# Altium PCB РАЗВОДКА.PcbDoc (part 2 of 2)
Units mm, origin at the board's own origin, x right, y up, seen from the top; angles counter-clockwise.
Board outline 89.98 x 48.1 mm, 2 copper layers (Top Layer, Bottom Layer); 66 components, 44 nets, 297 pads, 65 vias.
Unrouted connection lines stored in the file: 12.
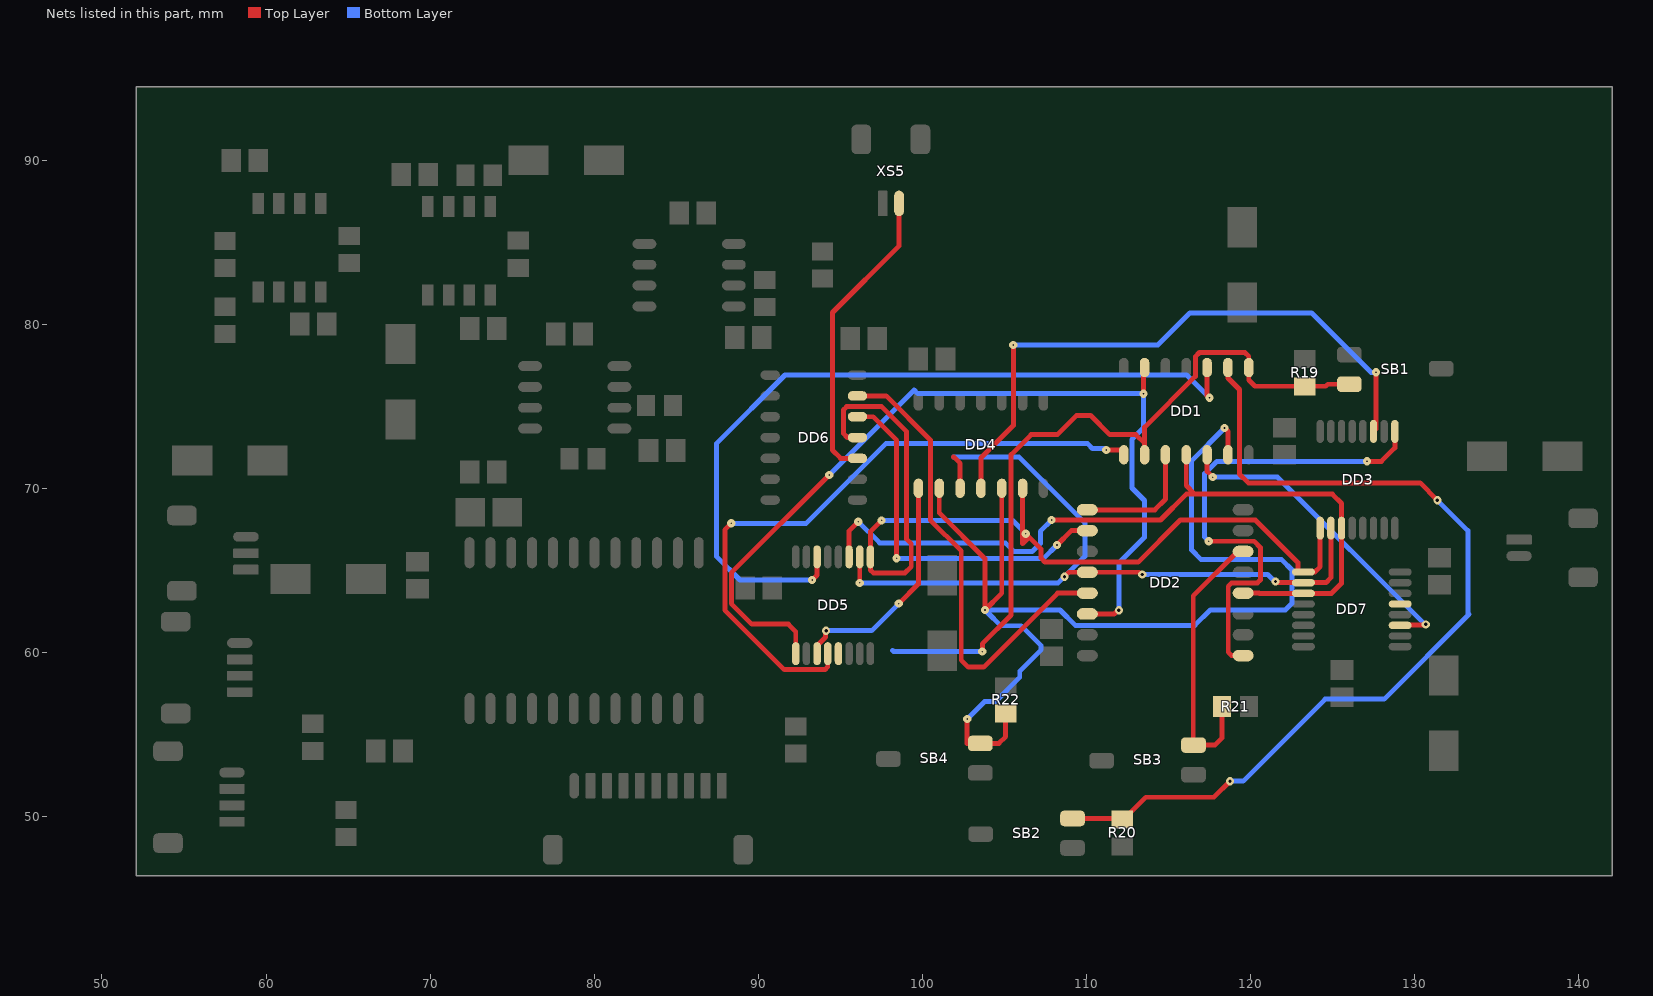
[diagram p2: the nets of this part, all layers, seen from the top]

## Via types
v1: diameter 0.5, hole 0.1, Top Layer to Bottom Layer, 37 vias
v2: diameter 0.5, hole 0.2, Top Layer to Bottom Layer, 22 vias
v3: diameter 3.8, hole 3.8, Top Layer to Bottom Layer, 4 vias
v4: diameter 0.711, hole 0.711, Top Layer to Bottom Layer, 2 vias

## Nets (pads, with @x,y where several pads share a name; then routed paths per layer and width w, separated by ;. In a path a pad name is that pad's centre, name@x,y a point inside that pad or via, vN(x,y) a via of type N, cw(c..) or ccw(c..) an arc to the next point about the centre after c; other vN are vias at no path point) (continued)
NetDD1_1: DD1.1 DD1.9 DD5.5 R19.1 SB1.2 | length 46.6
  Top Layer w0.3: v1(103.675,60.05) 103.675,60.52 105.435,62.281 105.435,72.06 106.655,73.279 108.25,73.279 109.421,74.45 110.27,74.45 111.441,73.279 113.037,73.279 113.57,72.746 ; DD1.9@113.57,72.05 113.57,72.746 ; SB1.2@126.05,76.35 124.737,76.35 124.612,76.225 R19.1@123.325,76.225 120.301,76.225 119.92,76.606 DD1.1@119.92,77.37 119.92,78.048 119.685,78.283 116.916,78.283 116.662,78.029 116.662,76.828 113.57,73.736 113.57,72.746
  Bottom Layer w0.3: 98.196,60.122 98.268,60.05 v1(103.675,60.05)
NetDD1_2: DD1.2 DD7.5 R20.1 SB2.2 | length 56.6
  Top Layer w0.3: SB2.2@109.175,49.875 112.15,49.875 R20.1@112.2,49.825 112.3,49.825 113.643,51.168 117.793,51.168 v2(118.775,52.15) ; DD1.2@118.65,77.37 118.65,76.733 119.355,76.029 119.355,70.866 119.888,70.333 130.364,70.333 v2(131.42,69.277)
  Bottom Layer w0.3: v2(118.775,52.15) 119.575,52.15 124.575,57.15 128.175,57.15 133.35,62.325 133.275,62.4 133.275,67.422 v2(131.42,69.277)
NetDD1_3: DD1.3 DD5.14 | length 49.1
  Top Layer w0.3: v1(93.294,64.414) 93.6,64.72 DD5.14@93.6,65.825 ; DD1.3@117.38,77.37 117.38,75.67 v1(117.525,75.525)
  Bottom Layer w0.3: v1(93.294,64.414) 88.9,64.414 87.478,65.837 87.478,72.746 91.643,76.911 116.139,76.911 v1(117.525,75.525)
NetDD1_6: DD1.6 DD2.14 DD5.1 | length 55.8
  Top Layer w0.3: DD5.1@92.3,59.925 92.3,61.268 91.846,61.722 89.62,61.722 88.375,62.967 88.375,64.855 v1(94.336,70.815) ; DD2.14@110.075,62.345 111.716,62.345 111.946,62.575 v2(112,62.575) ; v1(113.5,75.775) 113.5,77.3 DD1.6@113.57,77.37
  Bottom Layer w0.3: v1(94.336,70.815) 99.517,75.997 99.739,75.775 v1(113.5,75.775) 113.5,73.688 112.8,72.988 112.8,70.023 113.563,69.259 113.563,67.013 112,65.45 v2(112,62.575)
NetDD1_8: DD1.8 DD5.4 | length 40.5
  Top Layer w0.3: v1(88.367,67.869) 87.975,67.477 87.975,62.575 91.597,58.953 94.082,58.953 94.25,59.122 DD5.4@94.25,59.925 ; v1(111.227,72.339) 112.3,72.339 DD1.8@112.3,72.05
  Bottom Layer w0.3: v1(88.367,67.869) 92.939,67.869 97.795,72.725 110.094,72.725 110.386,72.433 111.133,72.433 v1(111.227,72.339)
NetDD1_10: DD1.10 DD2.9 | length 7.7
  Top Layer w0.3: DD2.9@110.075,68.695 114.198,68.695 114.84,69.337 DD1.10@114.84,72.05
NetDD1_11: DD1.11 DD2.4 DD3.11 DD5.11 DD7.11 | length 48.5
  Top Layer w0.3: DD5.11@95.55,65.825 95.55,67.407 v1(96.114,67.97) ; v1(107.899,68.072) 114.535,68.072 116.11,69.647 116.637,69.647 ; DD1.11@116.11,72.05 116.11,70.174 116.637,69.647 ; DD2.4@119.575,63.615 120.552,63.615 120.567,63.6 DD7.11@123.25,63.6 124.964,63.6 125.575,64.211 DD3.11@125.575,67.575 125.575,69.088 125.016,69.647 116.637,69.647
  Bottom Layer w0.3: v1(96.114,67.97) 97.409,66.675 105.08,66.675 105.613,66.142 106.705,66.142 107.213,66.65 107.213,67.386 v1(107.899,68.072)
NetDD1_12: DD1.12 DD7.3 | length 19.8
  Top Layer w0.3: DD1.12@117.38,72.05 117.38,71.037 v1(117.729,70.688) ; DD7.3@129.15,61.65 129.179,61.679 130.677,61.679 v2(130.708,61.71)
  Bottom Layer w0.3: v1(117.729,70.688) 121.67,70.688 130.648,61.71 v2(130.708,61.71)
NetDD1_13: DD1.13 DD4.2 DD4.5 R22.1 SB4.2 | length 71.2
  Top Layer w0.3: DD4.2@101.05,70.005 101.05,68.505 103.835,65.72 v1(103.835,62.586) 104.86,63.61 DD4.5@104.86,70.005 ; v1(102.751,55.938) 102.751,54.45 SB4.2@103.55,54.45 104.686,54.45 105.1,54.864 R22.1@105.1,56.275 ; v1(118.44,73.685) 118.65,73.476 DD1.13@118.65,72.05
  Bottom Layer w0.3: v1(102.751,55.938) 103.819,57.007 104.482,57.007 105.956,58.481 105.956,58.856 107.263,60.163 107.263,60.412 106.05,61.625 104.796,61.625 103.989,62.432 v1@103.989,62.586 ; v1(103.835,62.586) v1@103.989,62.586 ; v1(118.44,73.685) 116.434,71.679 116.434,66.243 117.018,65.659 121.92,65.659 122.555,65.024 122.555,62.992 122.149,62.586 117.57,62.586 116.635,61.65 109.349,61.65 108.414,62.586 v1@103.989,62.586
NetDD2_1: DD2.1 DD3.1 | length 29.9
  Top Layer w0.3: v1(117.475,66.777) 120.244,66.777 120.625,66.396 120.625,64.414 120.447,64.237 118.872,64.237 118.669,64.033 118.669,60.008 118.872,59.805 DD2.1@119.575,59.805 ; v1(127.125,71.65) 128.005,71.65 128.825,72.47 DD3.1@128.825,73.475
  Bottom Layer w0.3: v1(117.475,66.777) 117.229,67.023 117.229,70.895 117.984,71.65 v1(127.125,71.65)
NetDD2_6: DD2.6 R21.1 SB3.2 | length 17.1
  Top Layer w0.3: R21.1@118.275,56.7 118.275,54.769 117.856,54.35 SB3.2@116.55,54.35 116.535,54.35 116.535,63.449 119.241,66.155 DD2.6@119.575,66.155
NetDD2_10: DD2.10 DD6.12 | length 22.5
  Top Layer w0.3: DD6.12@96.06,74.37 97.015,74.37 98.45,72.935 v1(98.45,65.735) ; v1(108.229,66.548) 109.106,67.425 DD2.10@110.075,67.425
  Bottom Layer w0.3: v1(98.45,65.735) 107.417,65.735 v1(108.229,66.548)
NetDD2_12: DD2.12 DD3.10 DD4.3 DD5.10 DD7.10 | length 49.5
  Top Layer w0.3: v1(96.2,64.237) DD5.10@96.2,65.825 ; 101.922,71.925 102.32,71.526 DD4.3@102.32,70.005 ; v2(108.687,64.618) 108.954,64.885 DD2.12@110.075,64.885 113.236,64.885 113.371,64.75 v2(113.425,64.75) ; v2(121.55,64.325) 121.604,64.325 121.679,64.25 DD7.10@123.25,64.25 124.625,64.25 124.925,64.55 DD3.10@124.925,67.575
  Bottom Layer w0.3: v1(96.2,64.237) 108.306,64.237 109.925,65.856 109.925,67.9 105.901,71.925 101.922,71.925 ; v2(113.425,64.75) 121.071,64.75 121.496,64.325 v2(121.55,64.325)
NetDD2_13: DD2.13 DD6.13 | length 29.5
  Top Layer w0.3: DD6.13@96.06,75.64 97.817,75.64 100.508,72.949 100.508,68.068 102.387,66.189 102.387,59.53 102.819,59.098 103.752,59.098 108.268,63.615 DD2.13@110.075,63.615
NetDD3_3: DD3.3 DD4.4 | length 37.6
  Top Layer w0.3: DD4.4@103.59,70.005 103.59,71.865 105.562,73.838 v1(105.562,78.74) ; DD3.3@127.525,73.475 127.675,73.625 v1(127.675,77.075)
  Bottom Layer w0.3: v1(105.562,78.74) 114.376,78.74 116.332,80.696 123.749,80.696 127.37,77.075 v1(127.675,77.075)
NetDD3_9: DD3.9 DD4.6 DD5.9 DD6.11 DD7.9 | length 58.6
  Top Layer w0.3: DD6.11@96.06,73.1 95.454,73.1 95.199,73.355 95.199,74.778 95.402,74.981 97.536,74.981 99.06,73.457 99.06,66.904 99.339,66.624 99.339,65.227 98.958,64.846 97.028,64.846 96.85,65.024 DD5.9@96.85,65.825 96.85,67.361 v1(97.536,68.047) ; DD4.6@106.13,70.005 106.13,66.635 106.527,67.032 ; v1(106.324,67.234) 106.527,67.032 ; DD3.9@124.275,67.575 124.275,65.223 123.952,64.9 DD7.9@123.25,64.9 122.911,64.9 122.911,65.481 120.32,68.072 115.748,68.072 113.182,65.507 107.493,65.507 107.259,65.741 107.259,66.3 106.527,67.032
  Bottom Layer w0.3: v1(97.536,68.047) 105.512,68.047 v1(106.324,67.234)
NetDD4_1: DD4.1 DD5.3 | length 14.3
  Top Layer w0.3: DD5.3@93.6,59.925 93.6,60.422 94.112,60.933 94.112,61.287 v2(94.15,61.325) ; v1(98.575,62.975) 99.78,64.18 DD4.1@99.78,70.005
  Bottom Layer w0.3: v2(94.15,61.325) 96.925,61.325 v1(98.575,62.975)
NetDD6_10: DD6.10 XS5.1 | length 18.5
  Top Layer w0.3: DD6.10@96.06,71.83 95.036,71.83 94.539,72.328 94.539,80.721 98.6,84.782 XS5.1@98.6,87.375
pads on no net: DA4.3 DA6.5 DA6.8 DA7.5 DA7.8 DA33.2 DA33.3 DA33.4 DA33.5 DA33.23 DD2.2 DD2.3 DD2.5 DD2.7 DD2.11 DD2.15 DD3.6 DD4.8 DD4.9 DD4.10 DD4.11 DD4.12 DD4.13 DD5.6 DD6.1 DD6.2 DD6.3 DD6.4 DD6.5 DD6.6 DD6.8 DD6.9 DD7.6 SB1.3 SB2.3 SB3.3 SB4.3 XS1.11 XS1.12 XS2.3 XS2.4 XS3.4 XS3.5 XS4.5 XS4.6 XS5.3 XS5.4 XS6.5 XS6.6
copper on no net:
  other v3: 139.2,49.3

## Polygon pours and split planes (outlines as drawn)
D on Top Layer "NONET_L01_P-001" (solid, pour order 0): 95.3,93.5 142.075,93.5 141.85,46.7 141.5,46.35 96.8,46.35 96.8,54.775 88.2,54.775 88.2,65.175 89.6,65.175 89.6,77.667 91.9,77.667 91.9,81.475 95.3,81.475
A on Top Layer "GND A" (solid, pour order 1): 94.9,93.525 52.1,93.525 52.1,46.375 96.4,46.375 96.4,54.4 87.792,54.4 87.792,65.6 89.2,65.6 89.2,78.1 91.5,78.1 91.5,81.8 94.9,81.8
D on Bottom Layer "NONET_L01_P-001" (solid, pour order 3): 95.3,94.475 142.05,94.475 142.05,46.425 142.1,46.375 141.7,45.975 96.8,45.975 96.8,54.8 88.2,54.8 88.2,65.2 89.6,65.2 89.6,77.692 91.9,77.692 91.9,81.5 95.3,81.5
A on Bottom Layer "NONET_L01_P-001" (solid, pour order 2): 94.9,94.475 94.9,81.8 91.5,81.8 91.5,78.1 89.2,78.1 89.2,65.6 87.792,65.6 87.792,54.4 96.4,54.4 96.4,45.975 52.1,45.975 52.1,94.475

## Other copper
Top Layer:
  pour cut-out: 94.9,93.5 94.9,81.8 92.608,81.8 91.5,81.8 91.5,78.1 89.792,78.1 89.2,78.1 89.2,65.6 87.792,65.6 87.792,54.4 96.4,54.4 96.4,46.375 96.8,46.375 96.8,54.8 88.2,54.8 88.2,65.2 89.6,65.2 89.6,77.692 91.9,77.692 91.9,81.5 95.3,81.5 95.3,93.5
Bottom Layer:
  pour cut-out: 95.3,96.4 94.9,96.4 94.9,81.8 92.608,81.8 91.5,81.8 91.5,78.1 89.792,78.1 89.2,78.1 89.2,65.6 87.792,65.6 87.792,54.4 96.4,54.4 96.4,45.975 96.8,45.975 96.8,54.8 88.2,54.8 88.2,65.2 89.6,65.2 89.6,77.692 91.9,77.692 91.9,81.5 95.3,81.5

## Silkscreen, mask and mechanical layers (free items; w line width, h text height)
Top Overlay:
  lines w0.1: 56.475,78.575 58.425,78.575 58.425,81.9 56.475,81.9 56.475,78.575 ; 56.55,82.625 58.5,82.625 58.5,85.95 56.55,85.95 56.55,82.625 ; 56.975,89.075 60.3,89.075 60.3,91.025 56.975,91.025 56.975,89.075 ; 61.225,79.1 61.225,81.05 64.55,81.05 64.55,79.1 61.225,79.1 ; 61.75,53.15 61.75,56.475 63.65,56.475 63.65,53.15 61.75,53.15 ; 64.225,82.925 66.1,82.925 66.1,86.25 64.225,86.25 64.225,82.925 ; 65.975,52.975 65.975,54.925 69.3,54.925 69.3,52.975 65.975,52.975 ; 67.35,88.1 67.35,90.05 70.675,90.05 70.675,88.1 67.35,88.1 ; 68.252,62.927 68.252,66.252 70.202,66.252 70.202,62.927 68.252,62.927 ; 71.35,67.375 71.35,69.775 76,69.775 76,67.375 71.35,67.375 ; 71.375,88.2 71.375,90.15 74.7,90.15 74.7,88.2 71.375,88.2 ; 71.675,70 71.675,71.95 75,71.95 75,70 71.675,70 ; 71.7,78.8 71.7,80.75 75.025,80.75 75.025,78.8 71.7,78.8 ; 74.525,82.625 74.525,85.95 76.6,85.95 76.6,82.625 74.525,82.625 ; 76.825,78.4 76.825,80.35 80.15,80.35 80.15,78.4 76.825,78.4 ; 77.675,70.85 77.675,72.8 81,72.8 81,70.85 77.675,70.85 ; 82.325,74.05 82.325,76 85.65,76 85.65,74.05 82.325,74.05 ; 82.55,71.35 82.55,73.3 85.875,73.3 85.875,71.35 82.55,71.35 ; 84.325,85.875 84.325,87.825 87.65,87.825 87.65,85.875 84.325,85.875 ; 87.8,78.2 87.8,80.15 91.125,80.15 91.125,78.2 87.8,78.2 ; 88.325,62.95 88.325,64.9 91.65,64.9 91.65,62.95 88.325,62.95 ; 89.5,80.475 91.45,80.475 91.45,83.875 89.5,83.875 89.5,80.475 ; 91.325,52.925 93.275,52.925 93.275,56.25 91.325,56.25 91.325,52.925 ; 93,82 94.95,82 94.95,85.325 93,85.325 93,82 ; 94.675,78.175 94.675,80.125 98,80.125 98,78.175 94.675,78.175 ; 99,76.85 99,78.8 102.325,78.8 102.325,76.85 99,76.85 ; 104.05,55.375 104.05,58.7 106,58.7 106,55.375 104.05,55.375 ; 106.9,58.975 106.9,62.3 108.85,62.3 108.85,58.975 106.9,58.975 ; 111.25,47.325 111.25,50.65 113.2,50.65 113.2,47.325 111.25,47.325 ; 117.375,55.55 117.375,57.5 120.7,57.5 120.7,55.55 117.375,55.55 ; 121.125,71.25 121.125,74.575 123.075,74.575 123.075,71.25 121.125,71.25 ; 122.35,75.225 122.35,78.55 124.3,78.55 124.3,75.225 122.35,75.225 ; 124.65,56.425 124.65,59.75 126.6,59.75 126.6,56.425 124.65,56.425 ; 130.55,63.2 130.55,66.525 132.5,66.525 132.5,63.2 130.55,63.2
Bottom Overlay:
  lines w0.254: 48.5,92.95 49,94.55 ; 48.516,47.922 49,46.375 ; 48.975,94.55 48.975,46.27 51.7,46.27 ; 49.066,46.453 49.55,48 ; 49.075,94.5 49.559,92.953 ; 51.35,42.85 52.95,42.35 ; 51.4,42.925 52.947,43.409 ; 51.7,42.825 142.225,42.825 142.225,46.295 ; 140.575,43.35 142.122,42.866 ; 140.653,42.316 142.2,42.8
  lines w0.3: 48.975,94.55 53.175,94.55 ; 51.7,42.825 51.7,46.27
  lines w0.5: 52.1,46.375 142.075,46.375 142.075,94.475 52.1,94.475 52.1,46.375
  text "48" at 47.45,67.25 h1.52 r90
  text "90" at 88.525,43.825 h1.52
Mechanical 7:
  text "BOASFORMAT|А2|101|0|834645670|233858267|1000000000|4:1|" at 0,2540 h0
  text "DimPos|88444882|962805118|29153543|-27893701|27|3406301" at 150.6,2516.375 h0
  text "DimPos|100285433|958720472|20009842|-31692914|39|3115340" at 203.9,2515.65 h0
  text "DimPos|75068898|952381890|34094489|-37322834|17|2409980" at 104.075,2513.85 h0
  text "DimPos|68159449|967312992|32962599|-19291339|3|1537097" at 89.4,2505.975 h0
  text "DimPos|120708661|940826772|15501968|-45501968|35|3071255" at 267.225,2505.275 h0
  text "DimPos|132824803|945196850|19025590|-40994095|33|2865525" at 289.05,2504.925 h0
  text "DimPos|103661417|952096457|32677165|-33809055|17|2409980" at 180.3,2504.2 h0
  text "DimPos|94931102|955620079|42125984|-30137795|49|3115340" at 134.125,2503.825 h0
  text "DimPos|143523622|941112205|-984252|-44370078|17|2409980" at 367.05,2503.125 h0
  text "DimPos|104931102|969990157|9015748|-15354331|11|1904472" at 243.625,2502.775 h0
  text "DimPos|139438976|959281496|14222441|-25639764|3|1537097" at 318.05,2501.7 h0
  text "DimPos|153946850|949704724|-4084646|-34084646|5|1742827" at 401.4,2498.825 h0
  text "DimPos|145078740|947874016|-6899606|-35492126|51|2736209" at 386.025,2497.75 h0
  text "DimPos|87460630|957303150|59301181|-24094488|27|3406301" at 71.525,2492.75 h0
  text "DimPos|74360236|968149606|20708661|-12687008|3|1537097" at 136.275,2491.325 h0
  text "DimPos|111269685|948858268|18454724|-31417323|17|2409980" at 235.75,2489.9 h0
  text "DimPos|71259843|959557087|44232284|-16771653|57|3241717" at 68.65,2479.875 h0
  text "DimPos|149438976|939419291|-39724410|-36771654|23|3030109" at 480.475,2479.525 h0
  text "DimPos|42952756|968572835|25364173|-6761811|17|2409980" at 44.675,2477.35 h0
  text "DimPos|148877953|924202756|-40009842|-43248031|23|3030109" at 479.775,2457.325 h0
  text "DimPos|64645669|959281496|45216535|-8031496|29|3279924" at 49.35,2456.975 h0
  text "DimPos|166200787|939842520|-29301182|-19438976|3|1537097" at 496.575,2436.575 h0
  text "DimPos|59852362|966043307|40009842|7185039|17|2409980" at 50.4,2435.5 h0
  text "DimPos|50137795|960127953|33809055|5492126|31|2736209" at 41.475,2424.775 h0
  text "DimPos|171131890|932096457|-25501968|-15354330|9|1454805" at 499.45,2406.525 h0
  text "DimPos|41958661|959704724|27460630|13385826|43|2865525" at 36.825,2403.65 h0
  text "DimPos|42529528|952805118|27893701|11692913|45|3071255" at 37.175,2390.425 h0
  text "DimPos|54360236|960127953|37608267|26348425|55|3071255" at 42.55,2371.8 h0
  text "DimPos|158179134|927874016|-38592520|-1968504|17|2409980" at 499.8,2361.8 h0
  text "DimPos|44074803|940403543|27746063|13385826|3|1537097" at 41.475,2354.625 h0
  text "DimPos|59901575|929566929|41102362|6525590|17|2409980" at 47.75,2344.525 h0
  text "DimPos|158877953|915610236|-39724409|-3385827|3|1537097" at 504.45,2334.25 h0
  text "DimPos|66751969|953080709|39576772|34655512|17|2409980" at 69.025,2332.8 h0
  text "DimPos|51397638|952805118|33385827|35639764|17|2409980" at 45.75,2329.6 h0
  text "DimPos|41397638|929557087|22391732|21978347|13|2033788" at 48.275,2305.25 h0
  text "DimPos|41820866|919419291|26624016|18179134|15|2239518" at 38.6,2289.15 h0
  text "DimPos|49744094|914242126|29734251|16988189|53|2865525" at 50.825,2279.025 h0
  text "DimPos|149015748|917588583|-45639764|23671260|17|2409980" at 494.425,2270.55 h0
  text "DimPos|39704724|905895669|24931102|15501968|15|2239518" at 37.525,2261.6 h0
  text "DimPos|68730315|934625984|26200787|45492126|19|2283603" at 108.025,2258.4 h0
  text "DimPos|53228346|929271654|28169291|45915355|3|1537097" at 63.65,2243.725 h0
  text "DimPos|139586614|915196850|-30846457|33671259|51|2736209" at 432.9,2239.075 h0
  text "DimPos|116761811|917303150|9153543|38454725|51|2736209" at 273.325,2232.275 h0
  text "DimPos|59429134|947303150|43809055|69015748|3|1537097" at 39.675,2230.85 h0
  text "DimPos|79429134|924625984|43100394|48454724|25|3235839" at 92.275,2225.475 h0
  text "DimPos|121269685|903503937|2814961|28602362|5|1742827" at 300.875,2222.25 h0
  text "DimPos|128454724|903779528|-13523622|30846457|51|2736209" at 360.625,2217.25 h0
  text "DimPos|132539370|909694882|-21555118|36761811|5|1742827" at 391.4,2217.25 h0
  text "DimPos|130708661|922372047|-34084646|49438976|37|3241717" at 418.575,2217.25 h0
  text "DimPos|122401575|922657480|-6053149|49862204|17|2409980" at 326.275,2216.9 h0
  text "DimPos|112253937|927450787|24370079|55364173|3|1537097" at 223.225,2215.1 h0
  text "DimPos|111545276|909980315|13937008|38179134|5|1742827" at 247.925,2214.375 h0
  text "DimPos|103238189|925049213|26200787|56624016|23|3030109" at 195.675,2205.8 h0
  text "DimPos|83799213|904488189|28031496|37194882|7|1416598" at 141.65,2202.925 h0
  text "DimPos|93946850|927450787|49586614|61564960|17|2409980" at 112.675,2199.35 h0
  text "DimPos|96761811|914488189|32116142|49025591|47|3241717" at 164.2,2198.275 h0
  text "DimPos|67322835|938287402|50009843|73671260|17|2409980" at 43.975,2196.125 h0
  text "DimPos|99015748|939980315|70295276|79301181|21|2900793" at 72.95,2186.125 h0
  text "DimPos|76751969|940541339|31830709|85639764|47|3241717" at 114.1,2171.45 h0
  text "DimPos|84507874|945334646|19862205|91417323|41|2736209" at 164.2,2168.95 h0
  text "DimPos|58080709|911515748|38070866|61131890|17|2409980" at 50.825,2159.975 h0
  text "DimPos|76899606|947165354|48877952|98041338|27|3406301" at 71.175,2156.775 h0
  text "SET2|Superlayer=MechanicalLayer7|Wsuperlayer=MechanicalLayer8|Layergrid=MechanicalLayer9|Werase=MechanicalLayer11|Layermark=MechanicalLayer12|Layerstamp=MechanicalLayer13|Thinline=0,18|Basicline=0,6|Gridline=0,18|Boardline=0,6|Contourpolygonline=0,6|PcbGridStep=1,25|PcbGridCleareanceAtView=0|PcbGridNumberEach=l4|PcbGridLineEach=l2|PcbGridCountSecondaryStrip=1|PcbGridEnabledStrip=True|PcbSignalGridEnabled=True|PcbSignalShowBukva=True|RealSignalLayerNames=False|PcbGridEnabledBothSide=False|RealLayerNames=False|SilkShowPad=True|SilkViewName=Слой маркировки|SilkShowHole=True|SilkShowAxis=True|SilkShowBukva=True|SilkShowGrid=False|SolderShowGrid=False|SolderViewName=Слой маски|SolderShowAxis=False|SolderShowBukva=False|MainViewShowGrid=False|MainViewUseShapesDrill=False|ShowBukvaOnSboky=True|Density=2,2|TableName=Таблица 1|RazrezWidth=100|Sher=Rz 160|Asstoplayer=TopOverlay|Asstoplayer2=None|Assbottomlayer=TopOverlay|Assbottomlayer2=TopOverlay|AssMinDiameterHoles=2|AssDim=False|AssMech=False|AssSilk=False|AssComponentSilk=True|AssFreeSilk=False|AssSmdPads=False|AssGridEnable=False|Mirror=Horisontal|PcbGridFontSize=5|PcbGridCenterZero=False|TTStampDistance=12|MainFontSize=5|PolyStep=2|PcbDrillDrawingGridEnabled=False|PcbDrillDrawingViewName=Слой сверловки|PcbDrillDrawingShowBukva=False|PcbDrillDrawingShowAxis=False|PcbSignalLayersUseDrill=False|PcbSignalLayersUseShapesDrill=False|PcbSignalLayersShowAxis=False" at 0,0.025 h0
  text "2TT0007#  8 Клеймить." at 0,0 h0
  text "2TT0006#  7 Маркировать обозначение и заводской номер печатного узла черной краской МКЭ ОСТ 4ГО.054.2050М2 шрифтом 3,5 или 5 тип А ГОСТ 2.304-81, вместе, удобном для чтения." at 0,0 h0
  text "2TT0005#  6 Покрытие лак УР-231 ТУ6-21-14-90(3). Допускается покрытие лаком ЭП-730 ГОСТ 20824-81(3)." at 0,0 h0
  text "2TT0004#  5 Элементы поверхностного монтажа паять припойной пастой ПОС-61 ЛОК ТУ 400 К''Р''-1805-22-91, флюс ФПС-3 ТУ400 СП \"ЭВ\"-2178-137-98." at 0,0 h0
  text "2TT0003#  4 Меры защиты от статического электричества по ОСТ 92-1615-74. Степень жесткости II по ОСТ11.073.062-2001." at 0,0 h0
  text "2TT0002#  3** Размеры обеспеч. инстр." at 0,0 h0
  text "2TT0001#  2* Размеры для справок." at 0,0 h0
  text "2TT0000#  1 Установку элементов производить по чертежу." at 0,0 h0
  text "2STAMP|Разработал|Гончаренко А.Ю." at 0,0 h0
  text "2STAMP|Проверил|Смолин В.А." at 0,0 h0
  text "2STAMP|Утвердил|Рассказа Д.С." at 0,0 h0
  text "2STAMP|Var|Нач. отд." at 0,0 h0
  text "2STAMP|Tech|Т.контр." at 0,0 h0
  text "2STAMP|Normo|Н.контр." at 0,0 h0
  text "2STAMP|Check|Пров." at 0,0 h0
  text "2STAMP|Design|Разраб." at 0,0 h0
  text "2STAMP|Utv|Утв." at 0,0 h0
  text "2STAMP|Обозначение|СФ МЭИ КР ПЭ2-18 11.03.04 02 СБ" at 0,0 h0
  text "2STAMP|Организация|Филиал \"НИУ МЭИ\"" at 0,0 h0
  text "2STAMP|Наименование1|Цифровой" at 0,0 h0
  text "2STAMP|ТипДокумента|Сборочный чертёж" at 0,0 h0
  text "2STAMP|Масса|100" at 0,0 h0
  text "2STAMP|Наименование2|автомат" at 0,0 h0
  text "BOASVIADRILLTABLE:none,39370,37,|none,78740,22,|none,280000,2,|none,1496063,4," at 0,0 h0
  text "2BOASDRILLTABLE:" at 0,0 h0
Mechanical 9:
  drawing of 187 lines, arcs and shapes, not listed
  text "27" at 139.448,2518.905 h10.75
  text "39" at 193.487,2518.18 h10.75
  text "17" at 95.454,2516.38 h10.75
  text "3" at 82.996,2508.505 h10.75
  text "35" at 256.924,2507.805 h10.75
  text "33" at 279.272,2507.455 h10.75
  text "17" at 171.679,2506.73 h10.75
  text "49" at 123.712,2506.355 h10.75
  text "17" at 369.55,2505.655 h10.75
  text "11" at 236.288,2505.305 h10.75
  text "3" at 311.646,2504.23 h10.75
  text "5" at 403.9,2501.355 h10.75
  text "51" at 388.525,2500.28 h10.75
  text "27" at 60.373,2495.28 h10.75
  text "3" at 129.871,2493.855 h10.75
  text "17" at 227.129,2492.43 h10.75
  text "57" at 57.916,2482.405 h10.75
  text "23" at 482.975,2482.055 h10.75
  text "17" at 36.054,2479.88 h10.75
  text "23" at 482.275,2459.855 h10.75
  text "29" at 38.519,2459.505 h10.75
  text "3" at 499.075,2439.105 h10.75
  text "17" at 41.779,2438.03 h10.75
  text "31" at 32.025,2427.305 h10.75
  text "9" at 501.95,2409.055 h10.75
  text "43" at 27.047,2406.18 h10.75
  text "45" at 26.874,2392.955 h10.75
  text "55" at 32.249,2374.33 h10.75
  text "17" at 502.3,2364.33 h10.75
  text "3" at 35.071,2357.155 h10.75
  text "17" at 39.129,2347.055 h10.75
  text "3" at 506.95,2336.78 h10.75
  text "17" at 60.404,2335.33 h10.75
  text "17" at 37.129,2332.13 h10.75
  text "13" at 40.609,2307.78 h10.75
  text "15" at 30.412,2291.68 h10.75
  text "53" at 41.047,2281.555 h10.75
  text "17" at 496.925,2273.08 h10.75
  text "15" at 29.337,2264.13 h10.75
  text "19" at 99.725,2260.93 h10.75
  text "3" at 57.246,2246.255 h10.75
  text "51" at 435.4,2241.605 h10.75
  text "51" at 263.875,2234.805 h10.75
  text "3" at 33.271,2233.38 h10.75
  text "25" at 81.556,2228.005 h10.75
  text "5" at 293.948,2224.78 h10.75
  text "51" at 363.125,2219.78 h10.75
  text "5" at 393.9,2219.78 h10.75
  text "37" at 421.075,2219.78 h10.75
  text "17" at 328.775,2219.43 h10.75
  text "3" at 216.821,2217.63 h10.75
  text "5" at 240.998,2216.905 h10.75
  text "23" at 185.479,2208.33 h10.75
  text "7" at 135.552,2205.455 h10.75
  text "17" at 104.054,2201.88 h10.75
  text "47" at 153.466,2200.805 h10.75
  text "17" at 35.354,2198.655 h10.75
  text "21" at 63.082,2188.655 h10.75
  text "47" at 103.366,2173.98 h10.75
  text "41" at 154.75,2171.48 h10.75
  text "17" at 42.204,2162.505 h10.75
  text "27" at 60.023,2159.305 h10.75
Mechanical 13:
  lines w0.18: 404,2130 469,2130 ; 404,2135 469,2135 ; 404,2140 469,2140 ; 404,2145 469,2145 ; 404,2150 469,2150 ; 404,2165 469,2165 ; 404,2170 469,2170 ; 404,2175 469,2175 ; 543.96,2145 543.96,2160 ; 548.98,2145 548.98,2160
  lines w0.6: 8,2150 20,2150 ; 8,2185 20,2185 ; 8,2210 20,2210 ; 8,2235 20,2235 ; 8,2352 20,2352 ; 13,2125 13,2270 ; 13,2292 13,2412 ; 20,2270 8,2270 8,2125 20,2125 ; 20,2292 8,2292 8,2412 20,2412 ; 20,2521 90,2521 90,2535 ; 404,2125 404,2180 589,2180 ; 404,2155 469,2155 ; 404,2160 469,2160 ; 411,2155 411,2180 ; 421,2125 421,2180 ; 444,2125 444,2180 ; 459,2125 459,2180 ; 469,2125 469,2180 589,2180 ; 469,2140 539,2140 589,2140 ; 469,2165 589,2165 ; 539,2125 539,2165 ; 539,2145 589,2145 ; 539,2160 554,2160 589,2160 ; 554,2145 554,2165 ; 559.57,2140 559.57,2145 ; 571,2145 571,2165 ; 589,2188 589,2180 ; 20,2125 589,2125 589,2535 20,2535 20,2125
  text "СФ МЭИ КР ПЭ2-18 11.03.04 02 СБ" at 89.506,2530.018 h7.35 r180
  text "Перв. примен." at 11.976,2371.373 h5.38 r90
  text "Справ. №" at 11.976,2314.78 h5.38 r90
  text "Подп. и дата" at 11.976,2242.961 h5.38 r90
  text "Инв. № дубл." at 11.976,2213.457 h5.38 r90
  text "1 Установку элементов производить по чертежу." at 409,2200 h7.68
  text "Взам. инв. №" at 11.976,2188.496 h5.38 r90
  text "СФ МЭИ КР ПЭ2-18 11.03.04 02 СБ" at 492.949,2170.391 h7.68
  text "Лит." at 543.328,2161.024 h5.38
  text "Масса" at 558.108,2161.024 h5.38
  text "Масштаб" at 573.133,2161.024 h5.38
  text "Подп. и дата" at 11.976,2159.461 h5.38 r90
  text "Цифровой" at 493.004,2157.891 h7.68
  text "Изм." at 404.687,2156.024 h5.38
  text "Лист" at 412.024,2156.024 h5.38
  text "№ докум." at 426.271,2156.024 h5.38
  text "Подп." at 447.92,2156.024 h5.38
  text "Дата" at 459.963,2156.024 h5.38
  text "Разраб." at 404.533,2150.771 h5.38
  text "Гончаренко А.Ю." at 421.68,2150.771 h5.09
  text "100" at 559.069,2150.391 h7.68
  text "4:1" at 577.065,2150.391 h7.68
  text "автомат" at 494.47,2149.891 h7.68
  text "Пров." at 404.533,2145.771 h5.38
  text "Смолин В.А." at 421.68,2145.771 h5.38
  text "Сборочный чертёж" at 490.094,2142.524 h5.38
  text "Т.контр." at 404.533,2140.771 h5.38
  text "Лист" at 540.442,2140.771 h5.38
  text "Листов" at 561.485,2140.771 h5.38
  text "1" at 581.424,2140.771 h5.38
  text "Нач. отд." at 404.533,2135.771 h5.38
  text "2* Размеры для справок. /   3** Размеры обеспеч. инстр. /   4 Меры защиты от статического электричества по ОСТ 92-1615-74. Степень жесткости II по ОСТ11.073.062-2001. /   5 Элементы поверхностного монтажа паять припойной пастой ПОС-61 ЛОК ТУ 400 К''Р''-1805-22-91, флюс ФПС-3 ТУ400 СП \"ЭВ\"-2178-137-98.  /   6 Покрытие лак УР-231 ТУ6-21-14-90(3). Допускается покрытие лаком ЭП-730 ГОСТ 20824-81(3). /   7 Маркировать обозначение и заводской номер печатного узла черной краской МКЭ ОСТ 4ГО.054.2050М2 шрифтом 3,5 или 5 тип А ГОСТ 2.304-81, вместе, удобном для чтения. /   8 Клеймить." at 211.7,2132.4 h7.68
  text "Н.контр." at 404.533,2130.771 h5.38
  text "Филиал \"НИУ МЭИ\"" at 544.175,2130.391 h7.68
  text "Инв. № подл." at 11.976,2128.457 h5.38 r90
  text "Утв." at 404.533,2125.771 h5.38
  text "Рассказа Д.С." at 421.68,2125.771 h5.38
  text "Копировал" at 479.533,2120.771 h5.38
  text "Формат А2" at 560.474,2120.771 h5.38

## Text inside footprints (layer, text, board x,y; h text height)
ZBOAS336489963: Mechanical 12 "XS2" at 427.15,2351.175 h6.1; Mechanical 12 "R19" at 365.85,2413.975 h6.1; Mechanical 12 "С3" at 400.25,2341.575 h6.1; Mechanical 12 "R20" at 331.25,2294.275 h6.1; Mechanical 12 "R16" at 234.45,2437.075 h6.1; Mechanical 12 "XS5" at 264.55,2455.675 h6.1; Mechanical 12 "C15" at 166.35,2423.875 h6.1; Mechanical 12 "C28" at 165.75,2389.375 h6.1; Mechanical 12 "C21" at 106.95,2464.375 h6.1; Mechanical 12 "C9" at 367.45,2330.675 h6.1; Mechanical 12 "SB3" at 326.65,2323.175 h6.1; Mechanical 12 "SB2" at 297.95,2304.875 h6.1; Mechanical 12 "DA7" at 203.05,2443.175 h6.1; Mechanical 12 "XS1" at 204.85,2306.875 h6.1; Mechanical 12 "R17" at 102.65,2444.575 h6.1; Mechanical 12 "R15" at 102.25,2409.575 h6.1; Mechanical 12 "С12" at 103.25,2395.875 h6.1; Mechanical 12 "XS4" at 96.45,2340.575 h6.1 r270; Mechanical 12 "XS3" at 96.15,2369.275 h6.1 r270; Mechanical 12 "С1" at 420.55,2398.075 h6.1; Mechanical 12 "C11" at 407.85,2357.875 h6.1; Mechanical 12 "DD3" at 377.75,2391.175 h6.1; Mechanical 12 "DD1" at 337.05,2406.675 h6.1; Mechanical 12 "C7" at 304.775,2350.937 h6.1; Mechanical 12 "C10" at 274.65,2415.575 h6.1; Mechanical 12 "DD4" at 284.45,2398.675 h6.1; Mechanical 12 "С4" at 278.65,2364.775 h6.1; Mechanical 12 "C5" at 259.05,2420.775 h6.1; Mechanical 12 "R23" at 241.45,2326.175 h6.1; Mechanical 12 "C18" at 216.75,2414.175 h6.1; Mechanical 12 "C17" at 209.45,2380.775 h6.1; Mechanical 12 "С25" at 184.65,2470.475 h6.1; Mechanical 12 "C23" at 185.45,2421.975 h6.1; Mechanical 12 "DA6" at 174.75,2399.875 h6.1; Mechanical 12 "DA4" at 159.45,2445.275 h6.1; Mechanical 12 "C29" at 151.65,2372.375 h6.1; Mechanical 12 "DA5" at 117.55,2446.375 h6.1; Mechanical 12 "С20" at 126.05,2367.675 h6.1; Mechanical 12 "R1" at 123.35,2315.275 h6.1 r90; Mechanical 12 "R2" at 126.321,2299.516 h6.1; Mechanical 12 "XS6" at 93.995,2309.892 h6.1 r270; Mechanical 12 "SB1" at 386.85,2418.075 h6.1; Mechanical 12 "DD7" at 377.05,2361.575 h6.1; Mechanical 12 "С2" at 351.25,2450.075 h6.1; Mechanical 12 "C8" at 361.85,2379.875 h6.1; Mechanical 12 "R21" at 350.55,2329.975 h6.1; Mechanical 12 "DD2" at 323.85,2378.775 h6.1; Mechanical 12 "R22" at 293.05,2336.275 h6.1; Mechanical 12 "SB4" at 275.05,2322.775 h6.1; Mechanical 12 "R18" at 248.75,2441.775 h6.1; Mechanical 12 "DD6" at 244.65,2411.175 h6.1; Mechanical 12 "DD5" at 249.65,2361.675 h6.1; Mechanical 12 "C22" at 215.85,2450.775 h6.1; Mechanical 12 "R10" at 209.85,2403.975 h6.1; Mechanical 12 "R12" at 184.85,2435.175 h6.1; Mechanical 12 "R11" at 190.25,2378.775 h6.1; Mechanical 12 "DA33" at 191.15,2361.175 h6.1; Mechanical 12 "C24" at 148.65,2460.875 h6.1; Mechanical 12 "R14" at 164.25,2460.775 h6.1; Mechanical 12 "R13" at 142.75,2436.175 h6.1; Mechanical 12 "С19" at 144.65,2420.375 h6.1; Mechanical 12 "C14" at 149.05,2346.175 h6.1; Mechanical 12 "C13" at 143.05,2321.075 h6.1; Mechanical 12 "C16" at 124.25,2411.175 h6.1; Mechanical 12 "C6" at 235.45,2359.575 h6.1; Mechanical 12 "XS2" at 427.15,2351.175 h6.1; Mechanical 12 "R19" at 365.85,2413.975 h6.1; Mechanical 12 "С3" at 400.25,2341.575 h6.1; Mechanical 12 "R20" at 331.25,2294.275 h6.1; Mechanical 12 "R16" at 234.45,2437.075 h6.1; Mechanical 12 "XS5" at 264.55,2455.675 h6.1; Mechanical 12 "C15" at 166.35,2423.875 h6.1; Mechanical 12 "C28" at 165.75,2389.375 h6.1; Mechanical 12 "C21" at 106.95,2464.375 h6.1; Mechanical 12 "C9" at 367.45,2330.675 h6.1; Mechanical 12 "SB3" at 326.65,2323.175 h6.1; Mechanical 12 "SB2" at 297.95,2304.875 h6.1; Mechanical 12 "DA7" at 203.05,2443.175 h6.1; Mechanical 12 "XS1" at 204.85,2306.875 h6.1; Mechanical 12 "R17" at 102.65,2444.575 h6.1; Mechanical 12 "R15" at 102.25,2409.575 h6.1; Mechanical 12 "С12" at 103.25,2395.875 h6.1; Mechanical 12 "XS4" at 96.45,2340.575 h6.1 r270; Mechanical 12 "XS3" at 96.15,2369.275 h6.1 r270; Mechanical 12 "С1" at 420.55,2398.075 h6.1; Mechanical 12 "C11" at 407.85,2357.875 h6.1; Mechanical 12 "DD3" at 377.75,2391.175 h6.1; Mechanical 12 "DD1" at 337.05,2406.675 h6.1; Mechanical 12 "C7" at 304.775,2350.937 h6.1; Mechanical 12 "C10" at 274.65,2415.575 h6.1; Mechanical 12 "DD4" at 284.45,2398.675 h6.1; Mechanical 12 "С4" at 278.65,2364.775 h6.1; Mechanical 12 "C5" at 259.05,2420.775 h6.1; Mechanical 12 "R23" at 241.45,2326.175 h6.1; Mechanical 12 "C18" at 216.75,2414.175 h6.1; Mechanical 12 "C17" at 209.45,2380.775 h6.1; Mechanical 12 "С25" at 184.65,2470.475 h6.1; Mechanical 12 "C23" at 185.45,2421.975 h6.1; Mechanical 12 "DA6" at 174.75,2399.875 h6.1; Mechanical 12 "DA4" at 159.45,2445.275 h6.1; Mechanical 12 "C29" at 151.65,2372.375 h6.1; Mechanical 12 "DA5" at 117.55,2446.375 h6.1; Mechanical 12 "С20" at 126.05,2367.675 h6.1; Mechanical 12 "R1" at 123.35,2315.275 h6.1 r90; Mechanical 12 "R2" at 126.321,2299.516 h6.1; Mechanical 12 "XS6" at 93.995,2309.892 h6.1 r270; Mechanical 12 "SB1" at 386.85,2418.075 h6.1; Mechanical 12 "DD7" at 377.05,2361.575 h6.1; Mechanical 12 "С2" at 351.25,2450.075 h6.1; Mechanical 12 "C8" at 361.85,2379.875 h6.1; Mechanical 12 "R21" at 350.55,2329.975 h6.1; Mechanical 12 "DD2" at 323.85,2378.775 h6.1; Mechanical 12 "R22" at 293.05,2336.275 h6.1; Mechanical 12 "SB4" at 275.05,2322.775 h6.1; Mechanical 12 "R18" at 248.75,2441.775 h6.1; Mechanical 12 "DD6" at 244.65,2411.175 h6.1; Mechanical 12 "DD5" at 249.65,2361.675 h6.1; Mechanical 12 "C22" at 215.85,2450.775 h6.1; Mechanical 12 "R10" at 209.85,2403.975 h6.1; Mechanical 12 "R12" at 184.85,2435.175 h6.1; Mechanical 12 "R11" at 190.25,2378.775 h6.1; Mechanical 12 "DA33" at 191.15,2361.175 h6.1; Mechanical 12 "C24" at 148.65,2460.875 h6.1; Mechanical 12 "R14" at 164.25,2460.775 h6.1; Mechanical 12 "R13" at 142.75,2436.175 h6.1; Mechanical 12 "С19" at 144.65,2420.375 h6.1; Mechanical 12 "C14" at 149.05,2346.175 h6.1; Mechanical 12 "C13" at 143.05,2321.075 h6.1; Mechanical 12 "C16" at 124.25,2411.175 h6.1; Mechanical 12 "C6" at 235.45,2359.575 h6.1